# EAGLE board sequencia de led (EAGLE 9.7.0)

Size 115.62 x 110.8 mm. Coordinates in mm from the lower left corner, seen from the top.
Outline: 0,0 115.62,0 115.62,110.8 0,110.8 0,0
Copper layers (1*16): Top 0.035mm / dielectric 1.5mm / Bottom 0.035mm
Design rules "default": minimum track width 6mil, minimum drill 0.35mm, track to track 6mil, track to pad 6mil, pad to pad 6mil, via to via 6mil, smd to smd 6mil, copper to edge 40mil, drill to drill 6mil, minimum pad ring 10mil, minimum via ring 8mil, stop-mask expansion 4mil, vias tented up to drill 0mil, thermal gap 10mil

## Footprints (pad centres in the part's own frame; a part is rotated, then mirrored left to right if it is on the bottom)
LEDRD254W60D565H860B = drill 0.981 pad 1.581: 1 -1.27,0; 2 1.27,0
LEDRD254W60D565H860B_G = drill 0.981 pad 1.581: 1 -1.27,0; 2 1.27,0
LEDRD254W60D565H860B_Y = drill 0.981 pad 1.581: 1 -1.27,0; 2 1.27,0
LEDRD254W60D565H860B_B = drill 0.981 pad 1.581: 1 -1.27,0; 2 1.27,0
LEDRD254W60D565H860B_W = drill 0.981 pad 1.581: 1 -1.27,0; 2 1.27,0
RESAD1016W63L850D250B = drill 0.83 pad 1.43: 1 -5.08,0; 2 5.08,0
ARDUINO-UNO-R3-SHIELD = drill 1.016 pad 1.88: 3.3V 24.13,-2.54; 5V 24.13,0; A0 24.13,12.7; A1 24.13,15.24; A2 24.13,17.78; A3 24.13,20.32; A4 24.13,22.86; A5 24.13,25.4; AREF -24.13,-13.97; D2 -24.13,20.32; D3 -24.13,17.78; D4 -24.13,15.24; D5 -24.13,12.7; D6 -24.13,10.16; D7 -24.13,7.62; D8 -24.13,3.81; D9 -24.13,1.27; D10 -24.13,-1.27; D11 -24.13,-3.81; D12 -24.13,-6.35; D13 -24.13,-8.89; GND@0 24.13,2.54; GND@1 24.13,5.08; GND@2 -24.13,-11.43; IOREF 24.13,-7.62; NC 24.13,-10.16; RES 24.13,-5.08; RX -24.13,25.4; SCL -24.13,-19.05; SDA -24.13,-16.51; TX -24.13,22.86; VIN 24.13,7.62

## Placement (x,y rotation side)
DLED1  RED  [LEDRD254W60D565H860B]  107.71,103.2 90 top
DLED2  GREEN  [LEDRD254W60D565H860B_G]  107.71,95.58 90 top
DLED3  YELLOW  [LEDRD254W60D565H860B_Y]  107.71,87.96 90 top
DLED4  BLUE  [LEDRD254W60D565H860B_B]  107.71,80.34 90 top
DLED5  WHITE  [LEDRD254W60D565H860B_W]  107.71,72.72 90 top
RRES1  1k  [RESAD1016W63L850D250B]  97.55,104.47 0 top
RRES2  1k  [RESAD1016W63L850D250B]  97.55,96.85 0 top
RRES3  1k  [RESAD1016W63L850D250B]  97.55,89.23 0 top
RRES4  1k  [RESAD1016W63L850D250B]  97.55,81.61 0 top
RRES5  1k  [RESAD1016W63L850D250B]  97.55,73.99 0 top
USEQUENCIA_DE_LED  ARDUINO-UNO-R3-SHIELD  [ARDUINO-UNO-R3-SHIELD]  47.88,29.84 270 top

## Library data of the parts
DLED1 = Tinkercad; CATEGORY: Opto-Electronic; SUB-CATEGORY: LED; VALUE: LED_RED
DLED2 = Tinkercad; CATEGORY: Opto-Electronic; SUB-CATEGORY: LED; VALUE: LED_GREEN
DLED3 = Tinkercad; CATEGORY: Opto-Electronic; SUB-CATEGORY: LED; VALUE: LED_YELLOW
DLED4 = Tinkercad; CATEGORY: Opto-Electronic; SUB-CATEGORY: LED; VALUE: LED_BLUE
DLED5 = Tinkercad; CATEGORY: Opto-Electronic; SUB-CATEGORY: LED; VALUE: LED_WHITE
RRES1-RRES5 USEQUENCIA_DE_LED = Tinkercad

## Nets
DLED1_C: DLED1.2 RRES1.2
DLED2_C: DLED2.2 RRES2.2
DLED3_C: DLED3.2 RRES3.2
DLED4_C: DLED4.2 RRES4.2
DLED5_C: DLED5.2 RRES5.2
USEQUENCIA_DE_LED_D2: DLED1.1 USEQUENCIA_DE_LED.D2
USEQUENCIA_DE_LED_D3: DLED2.1 USEQUENCIA_DE_LED.D3
USEQUENCIA_DE_LED_D4: DLED3.1 USEQUENCIA_DE_LED.D4
USEQUENCIA_DE_LED_D5: DLED4.1 USEQUENCIA_DE_LED.D5
USEQUENCIA_DE_LED_D6: DLED5.1 USEQUENCIA_DE_LED.D6
USEQUENCIA_DE_LED_GND: RRES1.1 RRES2.1 RRES3.1 RRES4.1 RRES5.1 USEQUENCIA_DE_LED.GND@0 USEQUENCIA_DE_LED.GND@1 USEQUENCIA_DE_LED.GND@2

## Tracks (layer width: path | path; a pad name or v marks a point on that pad's centre or on a via)
DLED1_C  (1 unrouted)
DLED2_C  (1 unrouted)
DLED3_C  (1 unrouted)
DLED4_C  (1 unrouted)
DLED5_C  (1 unrouted)
USEQUENCIA_DE_LED_D2  (1 unrouted)
USEQUENCIA_DE_LED_D3  (1 unrouted)
USEQUENCIA_DE_LED_D4  (1 unrouted)
USEQUENCIA_DE_LED_D5  (1 unrouted)
USEQUENCIA_DE_LED_D6  (1 unrouted)
USEQUENCIA_DE_LED_GND  (7 unrouted)